# EAGLE board projeto (EAGLE 9.7.0)

Size 345.56 x 111.97 mm. Coordinates in mm from the lower left corner, seen from the top.
Outline: 0,0 345.56,0 345.56,111.97 0,111.97 0,0
Copper layers (1*16): Top 0.035mm / dielectric 1.5mm / Bottom 0.035mm
Design rules "default": minimum track width 6mil, minimum drill 0.35mm, track to track 6mil, track to pad 6mil, pad to pad 6mil, via to via 6mil, smd to smd 6mil, copper to edge 40mil, drill to drill 6mil, minimum pad ring 10mil, minimum via ring 8mil, stop-mask expansion 4mil, vias tented up to drill 0mil, thermal gap 10mil

## Footprints (pad centres in the part's own frame; a part is rotated, then mirrored left to right if it is on the bottom)
7SEG-13 = drill 0.813 long: 1 -5.08,-7.62; 2 -2.54,-7.62; 3 0,-7.62; 4 2.54,-7.62; 5 5.08,-7.62; 6 5.08,7.62; 7 2.54,7.62; 8 0,7.62; 9 -2.54,7.62; 10 -5.08,7.62
RESAD1016W63L850D250B = drill 0.83 pad 1.43: 1 -5.08,0; 2 5.08,0
78B04ST = drill 0.8: 1 -3.81,-3.81; 2 -1.27,-3.81; 3 1.27,-3.81; 4 3.81,-3.81; 5 3.81,3.81; 6 1.27,3.81; 7 -1.27,3.81; 8 -3.81,3.81
TO92 = drill 0.813 octagon: 1 -1.27,0; 2 0,1.905; 3 1.27,0
ARDUINO-UNO-R3-SHIELD = drill 1.016 pad 1.88: 3.3V 24.13,-2.54; 5V 24.13,0; A0 24.13,12.7; A1 24.13,15.24; A2 24.13,17.78; A3 24.13,20.32; A4 24.13,22.86; A5 24.13,25.4; AREF -24.13,-13.97; D2 -24.13,20.32; D3 -24.13,17.78; D4 -24.13,15.24; D5 -24.13,12.7; D6 -24.13,10.16; D7 -24.13,7.62; D8 -24.13,3.81; D9 -24.13,1.27; D10 -24.13,-1.27; D11 -24.13,-3.81; D12 -24.13,-6.35; D13 -24.13,-8.89; GND@0 24.13,2.54; GND@1 24.13,5.08; GND@2 -24.13,-11.43; IOREF 24.13,-7.62; NC 24.13,-10.16; RES 24.13,-5.08; RX -24.13,25.4; SCL -24.13,-19.05; SDA -24.13,-16.51; TX -24.13,22.86; VIN 24.13,7.62
DIP762W53P254L1969H508Q16B = drill 0.743 pad 1.343: 1 -3.81,8.89; 2 -3.81,6.35; 3 -3.81,3.81; 4 -3.81,1.27; 5 -3.81,-1.27; 6 -3.81,-3.81; 7 -3.81,-6.35; 8 -3.81,-8.89; 9 3.81,-8.89; 10 3.81,-6.35; 11 3.81,-3.81; 12 3.81,-1.27; 13 3.81,1.27; 14 3.81,3.81; 15 3.81,6.35; 16 3.81,8.89

## Placement (x,y rotation side)
DIGIT1  7SEG-CK  [7SEG-13]  119.04,73.89 0 top
DIGIT2  7SEG-CK  [7SEG-13]  131.74,73.89 0 top
DIGIT3  7SEG-CK  [7SEG-13]  144.44,73.89 0 top
DIGIT4  7SEG-CK  [7SEG-13]  157.14,73.89 0 top
R1  300  [RESAD1016W63L850D250B]  301.39,84.74 0 top
R2  300  [RESAD1016W63L850D250B]  303.93,82.2 0 top
R3  300  [RESAD1016W63L850D250B]  306.47,79.66 0 top
R4  300  [RESAD1016W63L850D250B]  309.01,77.12 0 top
R5  300  [RESAD1016W63L850D250B]  288.69,84.74 0 top
R6  300  [RESAD1016W63L850D250B]  286.15,82.2 0 top
R7  300  [RESAD1016W63L850D250B]  283.61,79.66 0 top
R8  150k  [RESAD1016W63L850D250B]  316.63,54.26 90 top
R9  150  [RESAD1016W63L850D250B]  139.78,9.24 180 top
R10  150  [RESAD1016W63L850D250B]  141.2,12.49 180 top
R11  150  [RESAD1016W63L850D250B]  142.62,15.74 180 top
R12  150  [RESAD1016W63L850D250B]  144.25,19.19 180 top
R13  150  [RESAD1016W63L850D250B]  146.14,22.44 180 top
R14  150  [RESAD1016W63L850D250B]  137.3,6.33 180 top
R15  150  [RESAD1016W63L850D250B]  147.82,25.4 0 top
SW1  SPST-478B04ST  [78B04ST]  87.4,102.45 0 top
T1  NPN  [TO92]  189.63,87.28 0 top
T2  NPN  [TO92]  197.25,87.28 0 top
T3  NPN  [TO92]  204.87,87.28 0 top
T4  NPN  [TO92]  212.49,87.28 0 top
U1  ARDUINO-UNO-R3-SHIELD  [ARDUINO-UNO-R3-SHIELD]  47.88,49.19 270 top
U2  CD4511_PDIP  [DIP762W53P254L1969H508Q16B]  330.6,73.31 90 top
U3  TMP36GT9Z_TO92  [TO92]  242.97,66.96 0 top

## Library data of the parts
DIGIT1-DIGIT4 = Tinkercad; CATEGORY: Opto-Electronic; SUB-CATEGORY: Display; TYPE: 7-Segment
R1-R15 SW1 U1-U3 = Tinkercad
T1-T4 = Tinkercad; CATEGORY: Transistor; SUB-CATEGORY: BJT; TYPE: NPN

## Nets
DIGIT1_CK2: DIGIT1.8 T4.3
DIGIT2_A: DIGIT1.7 DIGIT2.7 DIGIT3.7 R3.1
DIGIT2_B: DIGIT1.6 DIGIT2.6 DIGIT3.6 R2.1
DIGIT2_C: DIGIT1.4 DIGIT2.4 DIGIT3.4 R5.1
DIGIT2_CK2: DIGIT2.8 T3.3
DIGIT2_D: DIGIT1.2 DIGIT2.2 DIGIT3.2 R6.1
DIGIT2_E: DIGIT1.1 DIGIT2.1 DIGIT3.1 R7.1
DIGIT2_F: DIGIT1.9 DIGIT2.9 DIGIT3.9 R1.1
DIGIT2_G: DIGIT1.10 DIGIT2.10 DIGIT3.10 R4.1
DIGIT3_CK2: DIGIT3.8 T2.3
DIGIT4_A: DIGIT4.7 R15.2
DIGIT4_B: DIGIT4.6 R13.1
DIGIT4_C: DIGIT4.4 R12.1
DIGIT4_D: DIGIT4.2 R11.1
DIGIT4_E: DIGIT4.1 R10.1
DIGIT4_F: DIGIT4.9 R9.1
DIGIT4_G: DIGIT4.10 R14.1
U1_3.3V: U1.3.3V U3.3
U1_5V: R8.1 U1.5V U2.3 U2.16
U1_A0: U1.A0 U3.2
U1_A1: R12.2 U1.A1
U1_A2: R11.2 U1.A2
U1_A3: R10.2 U1.A3
U1_A4: R9.2 U1.A4
U1_A5: R14.2 U1.A5
U1_D2: T2.2 U1.D2
U1_D3: T3.2 U1.D3
U1_D4: T4.2 U1.D4
U1_D5: U1.D5 U2.7
U1_D6: U1.D6 U2.6
U1_D7: U1.D7 U2.2
U1_D8: U1.D8 U2.1
U1_D10: SW1.1 U1.D10
U1_D11: R15.1 U1.D11
U1_D12: R13.2 U1.D12
U1_D13: T1.2 U1.D13
U1_GND: DIGIT4.8 SW1.8 T1.1 T2.1 T3.1 T4.1 U1.GND@0 U1.GND@1 U1.GND@2 U2.5 U2.8 U3.1
U2_!BL: R8.2 U2.4
U2_A: R3.2 U2.13
U2_B: R2.2 U2.12
U2_C: R5.2 U2.11
U2_D: R6.2 U2.10
U2_E: R7.2 U2.9
U2_F: R1.2 U2.15
U2_G: R4.2 U2.14

## Tracks (layer width: path | path; a pad name or v marks a point on that pad's centre or on a via)
DIGIT1_CK2  (1 unrouted)
DIGIT2_A  (3 unrouted)
DIGIT2_B  (3 unrouted)
DIGIT2_C  (3 unrouted)
DIGIT2_CK2  (1 unrouted)
DIGIT2_D  (3 unrouted)
DIGIT2_E  (3 unrouted)
DIGIT2_F  (3 unrouted)
DIGIT2_G  (3 unrouted)
DIGIT3_CK2  (1 unrouted)
DIGIT4_A  (1 unrouted)
DIGIT4_B  (1 unrouted)
DIGIT4_C  (1 unrouted)
DIGIT4_D  (1 unrouted)
DIGIT4_E  (1 unrouted)
DIGIT4_F  (1 unrouted)
DIGIT4_G  (1 unrouted)
U1_3.3V  (1 unrouted)
U1_5V  (3 unrouted)
U1_A0  (1 unrouted)
U1_A1  (1 unrouted)
U1_A2  (1 unrouted)
U1_A3  (1 unrouted)
U1_A4  (1 unrouted)
U1_A5  (1 unrouted)
U1_D2  (1 unrouted)
U1_D3  (1 unrouted)
U1_D4  (1 unrouted)
U1_D5  (1 unrouted)
U1_D6  (1 unrouted)
U1_D7  (1 unrouted)
U1_D8  (1 unrouted)
U1_D10  (1 unrouted)
U1_D11  (1 unrouted)
U1_D12  (1 unrouted)
U1_D13  (1 unrouted)
U1_GND  (11 unrouted)
U2_!BL  (1 unrouted)
U2_A  (1 unrouted)
U2_B  (1 unrouted)
U2_C  (1 unrouted)
U2_D  (1 unrouted)
U2_E  (1 unrouted)
U2_F  (1 unrouted)
U2_G  (1 unrouted)